# EAGLE board Sim_Breakout_Panel-v13 (EAGLE 6.5.0)
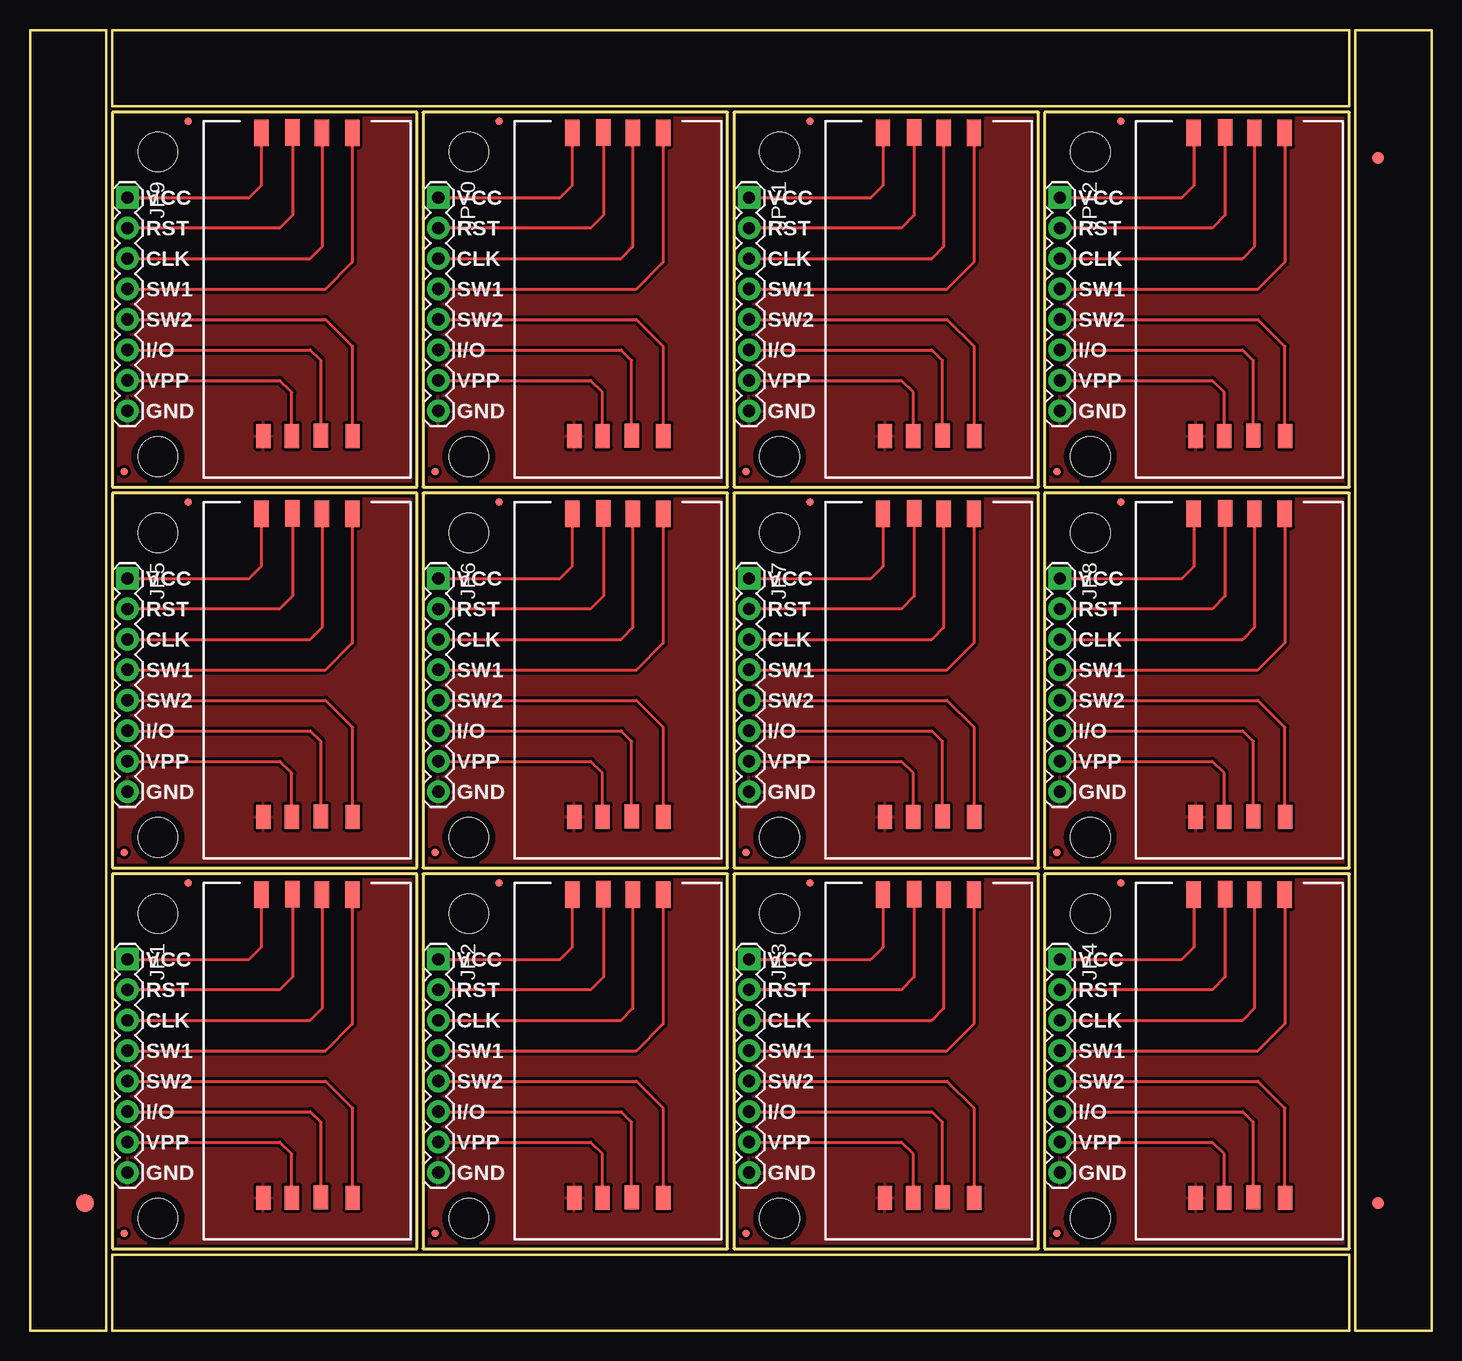
[diagram p0: board, top side]
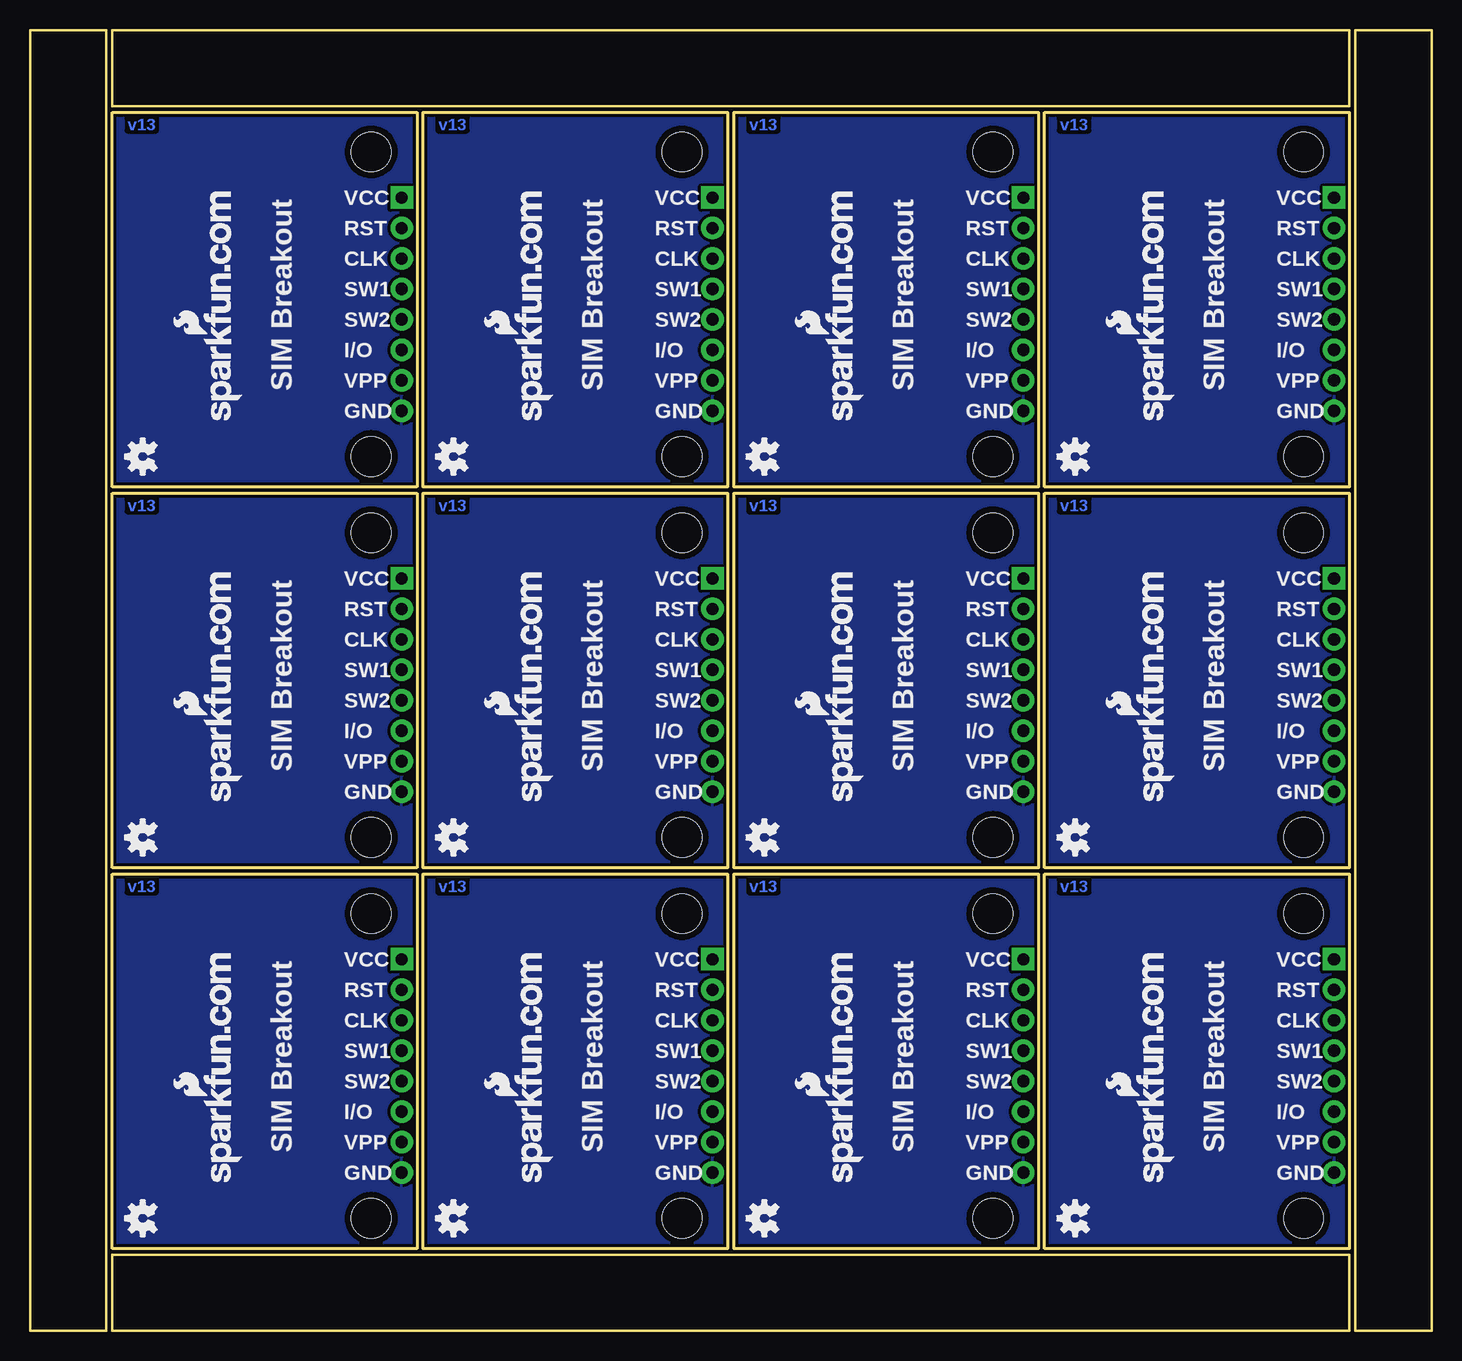
[diagram p1: board, bottom side, seen from below]

Size 116.84 x 108.46 mm. Coordinates in mm from the lower left corner, seen from the top.
Outline: 6.35,79.25 6.35,0 0,0 0,29.72
Outline: 116.84,79.25 116.84,0 110.49,0 110.49,29.72
Outline: 110.49,29.21 110.49,108.46 116.84,108.46 116.84,78.74
Outline: 0,29.21 0,108.46 6.35,108.46 6.35,78.74
Outline: 6.86,6.86 32.26,6.86 32.26,38.1 6.86,38.1 6.86,6.86
Outline: 32.77,6.86 58.17,6.86 58.17,38.1 32.77,38.1 32.77,6.86
Outline: 58.67,6.86 84.07,6.86 84.07,38.1 58.67,38.1 58.67,6.86
Outline: 84.58,6.86 109.98,6.86 109.98,38.1 84.58,38.1 84.58,6.86
Outline: 6.86,38.61 32.26,38.61 32.26,69.85 6.86,69.85 6.86,38.61
Outline: 32.77,38.61 58.17,38.61 58.17,69.85 32.77,69.85 32.77,38.61
Outline: 58.67,38.61 84.07,38.61 84.07,69.85 58.67,69.85 58.67,38.61
Outline: 84.58,38.61 109.98,38.61 109.98,69.85 84.58,69.85 84.58,38.61
Outline: 6.86,70.36 32.26,70.36 32.26,101.6 6.86,101.6 6.86,70.36
Outline: 32.77,70.36 58.17,70.36 58.17,101.6 32.77,101.6 32.77,70.36
Outline: 58.67,70.36 84.07,70.36 84.07,101.6 58.67,101.6 58.67,70.36
Outline: 84.58,70.36 109.98,70.36 109.98,101.6 84.58,101.6 84.58,70.36
Outline: 6.86,0 109.98,0 109.98,6.35 6.86,6.35 6.86,0
Outline: 109.98,108.46 6.86,108.46 6.86,102.11 109.98,102.11 109.98,108.46
Copper layers (1*16): Top 0.035mm / dielectric 1.5mm / Bottom 0.035mm
Design rules "SparkFun": minimum track width 8mil, minimum drill 20mil, track to track 8mil, track to pad 8mil, pad to pad 8mil, via to via 8mil, smd to smd 8mil, copper to edge 8mil, drill to drill 8mil, minimum pad ring 12mil, minimum via ring 10mil, stop-mask expansion 4mil, vias tented up to drill 20mil, thermal gap 10mil

## Footprints (pad centres in the part's own frame; a part is rotated, then mirrored left to right if it is on the bottom)
FIDUCIAL-1.5X3 = smd 1.5 x 1.5: 1 0,0
FIDUCIAL-1X2 = smd 1 x 1: 1 0,0
MICRO-FIDUCIAL = smd 0.635 x 0.635: 1 0,0
1X08 = drill 1.016 pad 1.88 square: 1 0,0 | drill 1.016 pad 1.88: 2 2.54,0; 3 5.08,0; 4 7.62,0; 5 10.16,0; 6 12.7,0; 7 15.24,0; 8 17.78,0
STAND-OFF = hole 3.302: 0,0
SIMHOLDER2 = smd 2.2 x 1.2: 1 0.95,4.81; 2 0.91,7.41; 3 0.95,9.86; 4 0.95,12.39 | smd 2 x 1.2: 5 26.22,12.42; 6 26.2,9.78; 7 26.22,7.34; 8 26.22,4.98

## Placement (x,y rotation side)
E$1  [FIDUCIAL-1.5X3]  4.57,10.67 0 top
E$4  [FIDUCIAL-1X2]  112.39,10.67 0 top
E$5  [FIDUCIAL-1X2]  112.39,97.79 180 top
FID1  FIDUCIALUFIDUCIAL  [MICRO-FIDUCIAL]  7.87,8.13 0 top
FID2  FIDUCIALUFIDUCIAL  [MICRO-FIDUCIAL]  13.21,37.34 0 top
FID3  FIDUCIALUFIDUCIAL  [MICRO-FIDUCIAL]  33.78,8.13 0 top
FID4  FIDUCIALUFIDUCIAL  [MICRO-FIDUCIAL]  39.12,37.34 0 top
FID5  FIDUCIALUFIDUCIAL  [MICRO-FIDUCIAL]  59.69,8.13 0 top
FID6  FIDUCIALUFIDUCIAL  [MICRO-FIDUCIAL]  65.02,37.34 0 top
FID7  FIDUCIALUFIDUCIAL  [MICRO-FIDUCIAL]  85.6,8.13 0 top
FID8  FIDUCIALUFIDUCIAL  [MICRO-FIDUCIAL]  90.93,37.34 0 top
FID9  FIDUCIALUFIDUCIAL  [MICRO-FIDUCIAL]  7.87,39.88 0 top
FID10  FIDUCIALUFIDUCIAL  [MICRO-FIDUCIAL]  13.21,69.09 0 top
FID11  FIDUCIALUFIDUCIAL  [MICRO-FIDUCIAL]  33.78,39.88 0 top
FID12  FIDUCIALUFIDUCIAL  [MICRO-FIDUCIAL]  39.12,69.09 0 top
FID13  FIDUCIALUFIDUCIAL  [MICRO-FIDUCIAL]  59.69,39.88 0 top
FID14  FIDUCIALUFIDUCIAL  [MICRO-FIDUCIAL]  65.02,69.09 0 top
FID15  FIDUCIALUFIDUCIAL  [MICRO-FIDUCIAL]  85.6,39.88 0 top
FID16  FIDUCIALUFIDUCIAL  [MICRO-FIDUCIAL]  90.93,69.09 0 top
FID17  FIDUCIALUFIDUCIAL  [MICRO-FIDUCIAL]  7.87,71.63 0 top
FID18  FIDUCIALUFIDUCIAL  [MICRO-FIDUCIAL]  13.21,100.84 0 top
FID19  FIDUCIALUFIDUCIAL  [MICRO-FIDUCIAL]  33.78,71.63 0 top
FID20  FIDUCIALUFIDUCIAL  [MICRO-FIDUCIAL]  39.12,100.84 0 top
FID21  FIDUCIALUFIDUCIAL  [MICRO-FIDUCIAL]  59.69,71.63 0 top
FID22  FIDUCIALUFIDUCIAL  [MICRO-FIDUCIAL]  65.02,100.84 0 top
FID23  FIDUCIALUFIDUCIAL  [MICRO-FIDUCIAL]  85.6,71.63 0 top
FID24  FIDUCIALUFIDUCIAL  [MICRO-FIDUCIAL]  90.93,100.84 0 top
JP1  [1X08]  8.13,30.99 270 top
JP2  [1X08]  34.04,30.99 270 top
JP3  [1X08]  59.94,30.99 270 top
JP4  [1X08]  85.85,30.99 270 top
JP5  [1X08]  8.13,62.74 270 top
JP6  [1X08]  34.04,62.74 270 top
JP7  [1X08]  59.94,62.74 270 top
JP8  [1X08]  85.85,62.74 270 top
JP9  [1X08]  8.13,94.49 270 top
JP10  [1X08]  34.04,94.49 270 top
JP11  [1X08]  59.94,94.49 270 top
JP12  [1X08]  85.85,94.49 270 top
LOGO1  OSHW-LOGOS  [OSHW-LOGO-S]  29.72,9.4 90 bottom
LOGO2  OSHW-LOGOS  [OSHW-LOGO-S]  55.63,9.4 90 bottom
LOGO3  OSHW-LOGOS  [OSHW-LOGO-S]  81.53,9.4 90 bottom
LOGO4  OSHW-LOGOS  [OSHW-LOGO-S]  107.44,9.4 90 bottom
LOGO5  OSHW-LOGOS  [OSHW-LOGO-S]  29.72,41.15 90 bottom
LOGO6  OSHW-LOGOS  [OSHW-LOGO-S]  55.63,41.15 90 bottom
LOGO7  OSHW-LOGOS  [OSHW-LOGO-S]  81.53,41.15 90 bottom
LOGO8  OSHW-LOGOS  [OSHW-LOGO-S]  107.44,41.15 90 bottom
LOGO9  OSHW-LOGOS  [OSHW-LOGO-S]  29.72,72.9 90 bottom
LOGO10  OSHW-LOGOS  [OSHW-LOGO-S]  55.63,72.9 90 bottom
LOGO11  OSHW-LOGOS  [OSHW-LOGO-S]  81.53,72.9 90 bottom
LOGO12  OSHW-LOGOS  [OSHW-LOGO-S]  107.44,72.9 90 bottom
STANDOFF1  STAND-OFF  [STAND-OFF]  10.67,34.8 0 top
STANDOFF2  STAND-OFF  [STAND-OFF]  10.67,9.4 0 top
STANDOFF3  STAND-OFF  [STAND-OFF]  36.58,34.8 0 top
STANDOFF4  STAND-OFF  [STAND-OFF]  36.58,9.4 0 top
STANDOFF5  STAND-OFF  [STAND-OFF]  62.48,34.8 0 top
STANDOFF6  STAND-OFF  [STAND-OFF]  62.48,9.4 0 top
STANDOFF7  STAND-OFF  [STAND-OFF]  88.39,34.8 0 top
STANDOFF8  STAND-OFF  [STAND-OFF]  88.39,9.4 0 top
STANDOFF9  STAND-OFF  [STAND-OFF]  10.67,66.55 0 top
STANDOFF10  STAND-OFF  [STAND-OFF]  10.67,41.15 0 top
STANDOFF11  STAND-OFF  [STAND-OFF]  36.58,66.55 0 top
STANDOFF12  STAND-OFF  [STAND-OFF]  36.58,41.15 0 top
STANDOFF13  STAND-OFF  [STAND-OFF]  62.48,66.55 0 top
STANDOFF14  STAND-OFF  [STAND-OFF]  62.48,41.15 0 top
STANDOFF15  STAND-OFF  [STAND-OFF]  88.39,66.55 0 top
STANDOFF16  STAND-OFF  [STAND-OFF]  88.39,41.15 0 top
STANDOFF17  STAND-OFF  [STAND-OFF]  10.67,98.3 0 top
STANDOFF18  STAND-OFF  [STAND-OFF]  10.67,72.9 0 top
STANDOFF19  STAND-OFF  [STAND-OFF]  36.58,98.3 0 top
STANDOFF20  STAND-OFF  [STAND-OFF]  36.58,72.9 0 top
STANDOFF21  STAND-OFF  [STAND-OFF]  62.48,98.3 0 top
STANDOFF22  STAND-OFF  [STAND-OFF]  62.48,72.9 0 top
STANDOFF23  STAND-OFF  [STAND-OFF]  88.39,98.3 0 top
STANDOFF24  STAND-OFF  [STAND-OFF]  88.39,72.9 0 top
U1  SIMHOLDER  [SIMHOLDER2]  40.39,37.34 270 top
U2  SIMHOLDER  [SIMHOLDER2]  14.48,37.34 270 top
U3  SIMHOLDER  [SIMHOLDER2]  66.29,37.34 270 top
U4  SIMHOLDER  [SIMHOLDER2]  92.2,37.34 270 top
U5  SIMHOLDER  [SIMHOLDER2]  14.48,69.09 270 top
U6  SIMHOLDER  [SIMHOLDER2]  40.39,69.09 270 top
U7  SIMHOLDER  [SIMHOLDER2]  66.29,69.09 270 top
U8  SIMHOLDER  [SIMHOLDER2]  92.2,69.09 270 top
U9  SIMHOLDER  [SIMHOLDER2]  14.48,100.84 270 top
U10  SIMHOLDER  [SIMHOLDER2]  40.39,100.84 270 top
U11  SIMHOLDER  [SIMHOLDER2]  66.29,100.84 270 top
U12  SIMHOLDER  [SIMHOLDER2]  92.2,100.84 270 top
U$1  [SFE-NEW-WEBLOGO]  21.46,12.45 90 bottom
U$2  [SFE-NEW-WEBLOGO]  47.37,12.45 90 bottom
U$3  [SFE-NEW-WEBLOGO]  73.28,12.45 90 bottom
U$4  [SFE-NEW-WEBLOGO]  99.19,12.45 90 bottom
U$5  [SFE-NEW-WEBLOGO]  21.46,44.2 90 bottom
U$6  [SFE-NEW-WEBLOGO]  47.37,44.2 90 bottom
U$7  [SFE-NEW-WEBLOGO]  73.28,44.2 90 bottom
U$8  [SFE-NEW-WEBLOGO]  99.19,44.2 90 bottom
U$9  [SFE-NEW-WEBLOGO]  21.46,75.95 90 bottom
U$10  [SFE-NEW-WEBLOGO]  47.37,75.95 90 bottom
U$11  [SFE-NEW-WEBLOGO]  73.28,75.95 90 bottom
U$12  [SFE-NEW-WEBLOGO]  99.19,75.95 90 bottom

## Library data of the parts
E$1 E$4 E$5 FID1-FID24 LOGO1-LOGO12 U$1-U$12 = SparkFun-Aesthetics
JP1-JP12 U1-U12 = SparkFun
STANDOFF1-STANDOFF24 = SparkFun-Electromechanical

## Nets
CLK: JP1.3 U2.3
CLK1: JP2.3 U1.3
CLK2: JP3.3 U3.3
CLK3: JP4.3 U4.3
CLK4: JP5.3 U5.3
CLK5: JP6.3 U6.3
CLK6: JP7.3 U7.3
CLK7: JP8.3 U8.3
CLK8: JP9.3 U9.3
CLK9: JP10.3 U10.3
CLK10: JP11.3 U11.3
CLK11: JP12.3 U12.3
GND: JP1.8 U2.8
GND1: JP2.8 U1.8
GND2: JP3.8 U3.8
GND3: JP4.8 U4.8
GND4: JP5.8 U5.8
GND5: JP6.8 U6.8
GND6: JP7.8 U7.8
GND7: JP8.8 U8.8
GND8: JP9.8 U9.8
GND9: JP10.8 U10.8
GND10: JP11.8 U11.8
GND11: JP12.8 U12.8
I/O: JP1.6 U2.6
I/O1: JP2.6 U1.6
I/O2: JP3.6 U3.6
I/O3: JP4.6 U4.6
I/O4: JP5.6 U5.6
I/O5: JP6.6 U6.6
I/O6: JP7.6 U7.6
I/O7: JP8.6 U8.6
I/O8: JP9.6 U9.6
I/O9: JP10.6 U10.6
I/O10: JP11.6 U11.6
I/O11: JP12.6 U12.6
RST: JP1.2 U2.2
RST1: JP2.2 U1.2
RST2: JP3.2 U3.2
RST3: JP4.2 U4.2
RST4: JP5.2 U5.2
RST5: JP6.2 U6.2
RST6: JP7.2 U7.2
RST7: JP8.2 U8.2
RST8: JP9.2 U9.2
RST9: JP10.2 U10.2
RST10: JP11.2 U11.2
RST11: JP12.2 U12.2
SW1: JP1.4 U2.4
SW2: JP1.5 U2.5
SW3: JP2.4 U1.4
SW4: JP2.5 U1.5
SW5: JP3.4 U3.4
SW6: JP3.5 U3.5
SW7: JP4.4 U4.4
SW8: JP4.5 U4.5
SW9: JP5.4 U5.4
SW10: JP5.5 U5.5
SW11: JP6.4 U6.4
SW12: JP6.5 U6.5
SW13: JP7.4 U7.4
SW14: JP7.5 U7.5
SW15: JP8.4 U8.4
SW16: JP8.5 U8.5
SW17: JP9.4 U9.4
SW18: JP9.5 U9.5
SW19: JP10.4 U10.4
SW20: JP10.5 U10.5
SW21: JP11.4 U11.4
SW22: JP11.5 U11.5
SW23: JP12.4 U12.4
SW24: JP12.5 U12.5
VCC: JP1.1 U2.1
VCC1: JP2.1 U1.1
VCC2: JP3.1 U3.1
VCC3: JP4.1 U4.1
VCC4: JP5.1 U5.1
VCC5: JP6.1 U6.1
VCC6: JP7.1 U7.1
VCC7: JP8.1 U8.1
VCC8: JP9.1 U9.1
VCC9: JP10.1 U10.1
VCC10: JP11.1 U11.1
VCC11: JP12.1 U12.1
VPP: JP1.7 U2.7
VPP1: JP2.7 U1.7
VPP2: JP3.7 U3.7
VPP3: JP4.7 U4.7
VPP4: JP5.7 U5.7
VPP5: JP6.7 U6.7
VPP6: JP7.7 U7.7
VPP7: JP8.7 U8.7
VPP8: JP9.7 U9.7
VPP9: JP10.7 U10.7
VPP10: JP11.7 U11.7
VPP11: JP12.7 U12.7

## Tracks (layer width: path | path; a pad name or v marks a point on that pad's centre or on a via)
CLK
  Top 0.254: U2.3 24.34,26.88 23.37,25.91 JP1.3
CLK1
  Top 0.254: U1.3 50.25,26.88 49.28,25.91 JP2.3
CLK2
  Top 0.254: U3.3 76.15,26.88 75.18,25.91 JP3.3
CLK3
  Top 0.254: U4.3 102.06,26.88 101.09,25.91 JP4.3
CLK4
  Top 0.254: U5.3 24.34,58.63 23.37,57.66 JP5.3
CLK5
  Top 0.254: U6.3 50.25,58.63 49.28,57.66 JP6.3
CLK6
  Top 0.254: U7.3 76.15,58.63 75.18,57.66 JP7.3
CLK7
  Top 0.254: U8.3 102.06,58.63 101.09,57.66 JP8.3
CLK8
  Top 0.254: U9.3 24.34,90.38 23.37,89.41 JP9.3
CLK9
  Top 0.254: U10.3 50.25,90.38 49.28,89.41 JP10.3
CLK10
  Top 0.254: U11.3 76.15,90.38 75.18,89.41 JP11.3
CLK11
  Top 0.254: U12.3 102.06,90.38 101.09,89.41 JP12.3
GND
  Top 0.254: U2.8 19.56,11.02 19.56,10.67
  pour Bottom (isolate 0.254): 6.86,6.86 6.86,38.1 32.26,38.1 32.26,6.86
  pour Top (isolate 0.254): 6.86,6.86 6.86,38.1 32.26,38.1 32.26,6.86
GND1
  Top 0.254: U1.8 45.47,11.02 45.47,10.67
  pour Bottom (isolate 0.254): 32.77,6.86 32.77,38.1 58.17,38.1 58.17,6.86
  pour Top (isolate 0.254): 32.77,6.86 32.77,38.1 58.17,38.1 58.17,6.86
GND2
  Top 0.254: U3.8 71.37,11.02 71.37,10.67
  pour Bottom (isolate 0.254): 58.67,6.86 58.67,38.1 84.07,38.1 84.07,6.86
  pour Top (isolate 0.254): 58.67,6.86 58.67,38.1 84.07,38.1 84.07,6.86
GND3
  Top 0.254: U4.8 97.28,11.02 97.28,10.67
  pour Bottom (isolate 0.254): 84.58,6.86 84.58,38.1 109.98,38.1 109.98,6.86
  pour Top (isolate 0.254): 84.58,6.86 84.58,38.1 109.98,38.1 109.98,6.86
GND4
  Top 0.254: U5.8 19.56,42.77 19.56,42.42
  pour Bottom (isolate 0.254): 6.86,38.61 6.86,69.85 32.26,69.85 32.26,38.61
  pour Top (isolate 0.254): 6.86,38.61 6.86,69.85 32.26,69.85 32.26,38.61
GND5
  Top 0.254: U6.8 45.47,42.77 45.47,42.42
  pour Bottom (isolate 0.254): 32.77,38.61 32.77,69.85 58.17,69.85 58.17,38.61
  pour Top (isolate 0.254): 32.77,38.61 32.77,69.85 58.17,69.85 58.17,38.61
GND6
  Top 0.254: U7.8 71.37,42.77 71.37,42.42
  pour Bottom (isolate 0.254): 58.67,38.61 58.67,69.85 84.07,69.85 84.07,38.61
  pour Top (isolate 0.254): 58.67,38.61 58.67,69.85 84.07,69.85 84.07,38.61
GND7
  Top 0.254: U8.8 97.28,42.77 97.28,42.42
  pour Bottom (isolate 0.254): 84.58,38.61 84.58,69.85 109.98,69.85 109.98,38.61
  pour Top (isolate 0.254): 84.58,38.61 84.58,69.85 109.98,69.85 109.98,38.61
GND8
  Top 0.254: U9.8 19.56,74.52 19.56,74.17
  pour Bottom (isolate 0.254): 6.86,70.36 6.86,101.6 32.26,101.6 32.26,70.36
  pour Top (isolate 0.254): 6.86,70.36 6.86,101.6 32.26,101.6 32.26,70.36
GND9
  Top 0.254: U10.8 45.47,74.52 45.47,74.17
  pour Bottom (isolate 0.254): 32.77,70.36 32.77,101.6 58.17,101.6 58.17,70.36
  pour Top (isolate 0.254): 32.77,70.36 32.77,101.6 58.17,101.6 58.17,70.36
GND10
  Top 0.254: U11.8 71.37,74.52 71.37,74.17
  pour Bottom (isolate 0.254): 58.67,70.36 58.67,101.6 84.07,101.6 84.07,70.36
  pour Top (isolate 0.254): 58.67,70.36 58.67,101.6 84.07,101.6 84.07,70.36
GND11
  Top 0.254: U12.8 97.28,74.52 97.28,74.17
  pour Bottom (isolate 0.254): 84.58,70.36 84.58,101.6 109.98,101.6 109.98,70.36
  pour Top (isolate 0.254): 84.58,70.36 84.58,101.6 109.98,101.6 109.98,70.36
I/O
  Top 0.254: JP1.6 23.37,18.29 24.26,17.4 U2.6
I/O1
  Top 0.254: JP2.6 49.28,18.29 50.17,17.4 U1.6
I/O2
  Top 0.254: JP3.6 75.18,18.29 76.07,17.4 U3.6
I/O3
  Top 0.254: JP4.6 101.09,18.29 101.98,17.4 U4.6
I/O4
  Top 0.254: JP5.6 23.37,50.04 24.26,49.15 U5.6
I/O5
  Top 0.254: JP6.6 49.28,50.04 50.17,49.15 U6.6
I/O6
  Top 0.254: JP7.6 75.18,50.04 76.07,49.15 U7.6
I/O7
  Top 0.254: JP8.6 101.09,50.04 101.98,49.15 U8.6
I/O8
  Top 0.254: JP9.6 23.37,81.79 24.26,80.9 U9.6
I/O9
  Top 0.254: JP10.6 49.28,81.79 50.17,80.9 U10.6
I/O10
  Top 0.254: JP11.6 75.18,81.79 76.07,80.9 U11.6
I/O11
  Top 0.254: JP12.6 101.09,81.79 101.98,80.9 U12.6
RST
  Top 0.254: U2.2 21.89,29.51 20.83,28.45 JP1.2
RST1
  Top 0.254: U1.2 47.8,29.51 46.74,28.45 JP2.2
RST2
  Top 0.254: U3.2 73.7,29.51 72.64,28.45 JP3.2
RST3
  Top 0.254: U4.2 99.61,29.51 98.55,28.45 JP4.2
RST4
  Top 0.254: U5.2 21.89,61.26 20.83,60.2 JP5.2
RST5
  Top 0.254: U6.2 47.8,61.26 46.74,60.2 JP6.2
RST6
  Top 0.254: U7.2 73.7,61.26 72.64,60.2 JP7.2
RST7
  Top 0.254: U8.2 99.61,61.26 98.55,60.2 JP8.2
RST8
  Top 0.254: U9.2 21.89,93.01 20.83,91.95 JP9.2
RST9
  Top 0.254: U10.2 47.8,93.01 46.74,91.95 JP10.2
RST10
  Top 0.254: U11.2 73.7,93.01 72.64,91.95 JP11.2
RST11
  Top 0.254: U12.2 99.61,93.01 98.55,91.95 JP12.2
SW1
  Top 0.254: U2.4 26.87,25.6 24.64,23.37 JP1.4
SW2
  Top 0.254: JP1.5 24.64,20.83 26.9,18.57 U2.5
SW3
  Top 0.254: U1.4 52.78,25.6 50.55,23.37 JP2.4
SW4
  Top 0.254: JP2.5 50.55,20.83 52.81,18.57 U1.5
SW5
  Top 0.254: U3.4 78.68,25.6 76.45,23.37 JP3.4
SW6
  Top 0.254: JP3.5 76.45,20.83 78.71,18.57 U3.5
SW7
  Top 0.254: U4.4 104.59,25.6 102.36,23.37 JP4.4
SW8
  Top 0.254: JP4.5 102.36,20.83 104.62,18.57 U4.5
SW9
  Top 0.254: U5.4 26.87,57.35 24.64,55.12 JP5.4
SW10
  Top 0.254: JP5.5 24.64,52.58 26.9,50.32 U5.5
SW11
  Top 0.254: U6.4 52.78,57.35 50.55,55.12 JP6.4
SW12
  Top 0.254: JP6.5 50.55,52.58 52.81,50.32 U6.5
SW13
  Top 0.254: U7.4 78.68,57.35 76.45,55.12 JP7.4
SW14
  Top 0.254: JP7.5 76.45,52.58 78.71,50.32 U7.5
SW15
  Top 0.254: U8.4 104.59,57.35 102.36,55.12 JP8.4
SW16
  Top 0.254: JP8.5 102.36,52.58 104.62,50.32 U8.5
SW17
  Top 0.254: U9.4 26.87,89.1 24.64,86.87 JP9.4
SW18
  Top 0.254: JP9.5 24.64,84.33 26.9,82.07 U9.5
SW19
  Top 0.254: U10.4 52.78,89.1 50.55,86.87 JP10.4
SW20
  Top 0.254: JP10.5 50.55,84.33 52.81,82.07 U10.5
SW21
  Top 0.254: U11.4 78.68,89.1 76.45,86.87 JP11.4
SW22
  Top 0.254: JP11.5 76.45,84.33 78.71,82.07 U11.5
SW23
  Top 0.254: U12.4 104.59,89.1 102.36,86.87 JP12.4
SW24
  Top 0.254: JP12.5 102.36,84.33 104.62,82.07 U12.5
VCC
  Top 0.254: JP1.1 18.29,30.99 19.29,31.99 U2.1
VCC1
  Top 0.254: JP2.1 44.2,30.99 45.2,31.99 U1.1
VCC2
  Top 0.254: JP3.1 70.1,30.99 71.1,31.99 U3.1
VCC3
  Top 0.254: JP4.1 96.01,30.99 97.01,31.99 U4.1
VCC4
  Top 0.254: JP5.1 18.29,62.74 19.29,63.74 U5.1
VCC5
  Top 0.254: JP6.1 44.2,62.74 45.2,63.74 U6.1
VCC6
  Top 0.254: JP7.1 70.1,62.74 71.1,63.74 U7.1
VCC7
  Top 0.254: JP8.1 96.01,62.74 97.01,63.74 U8.1
VCC8
  Top 0.254: JP9.1 18.29,94.49 19.29,95.49 U9.1
VCC9
  Top 0.254: JP10.1 44.2,94.49 45.2,95.49 U10.1
VCC10
  Top 0.254: JP11.1 70.1,94.49 71.1,95.49 U11.1
VCC11
  Top 0.254: JP12.1 96.01,94.49 97.01,95.49 U12.1
VPP
  Top 0.254: JP1.7 20.83,15.75 21.82,14.76 U2.7
VPP1
  Top 0.254: JP2.7 46.74,15.75 47.73,14.76 U1.7
VPP2
  Top 0.254: JP3.7 72.64,15.75 73.63,14.76 U3.7
VPP3
  Top 0.254: JP4.7 98.55,15.75 99.54,14.76 U4.7
VPP4
  Top 0.254: JP5.7 20.83,47.5 21.82,46.51 U5.7
VPP5
  Top 0.254: JP6.7 46.74,47.5 47.73,46.51 U6.7
VPP6
  Top 0.254: JP7.7 72.64,47.5 73.63,46.51 U7.7
VPP7
  Top 0.254: JP8.7 98.55,47.5 99.54,46.51 U8.7
VPP8
  Top 0.254: JP9.7 20.83,79.25 21.82,78.26 U9.7
VPP9
  Top 0.254: JP10.7 46.74,79.25 47.73,78.26 U10.7
VPP10
  Top 0.254: JP11.7 72.64,79.25 73.63,78.26 U11.7
VPP11
  Top 0.254: JP12.7 98.55,79.25 99.54,78.26 U12.7

## Text on the board
Bottom: v13 | v13 | v13 | v13 | v13 | v13 | v13 | v13 | v13 | v13 | v13 | v13
tPlace: VCC | VCC | VCC | VCC | RST | RST | RST | RST | CLK | CLK | CLK | CLK | SW1 | SW1 | SW1 | SW1 | SW2 | SW2 | SW2 | SW2 | I/O | I/O | I/O | I/O | VPP | VPP | VPP | VPP | GND | GND | GND | GND | VCC | VCC | VCC | VCC | RST | RST | RST | RST | CLK | CLK | CLK | CLK | SW1 | SW1 | SW1 | SW1 | SW2 | SW2 | SW2 | SW2 | I/O | I/O | I/O | I/O | VPP | VPP | VPP | VPP | GND | GND | GND | GND | VCC | VCC | VCC | VCC | RST | RST | RST | RST | CLK | CLK | CLK | CLK | SW1 | SW1 | SW1 | SW1 | SW2 | SW2 | SW2 | SW2 | I/O | I/O | I/O | I/O | VPP | VPP | VPP | VPP | GND | GND | GND | GND
bPlace: VCC | SIM Breakout | VCC | SIM Breakout | VCC | SIM Breakout | VCC | SIM Breakout | RST | RST | RST | RST | CLK | CLK | CLK | CLK | SW1 | SW1 | SW1 | SW1 | SW2 | SW2 | SW2 | SW2 | I/O | I/O | I/O | I/O | VPP | VPP | VPP | VPP | GND | GND | GND | GND | SIM Breakout | SIM Breakout | SIM Breakout | SIM Breakout | VCC | VCC | VCC | VCC | RST | RST | RST | RST | CLK | CLK | CLK | CLK | SW1 | SW1 | SW1 | SW1 | SW2 | SW2 | SW2 | SW2 | I/O | I/O | I/O | I/O | VPP | VPP | VPP | VPP | GND | GND | GND | GND | SIM Breakout | SIM Breakout | SIM Breakout | SIM Breakout | VCC | VCC | VCC | VCC | RST | RST | RST | RST | CLK | CLK | CLK | CLK | SW1 | SW1 | SW1 | SW1 | SW2 | SW2 | SW2 | SW2 | I/O | I/O | I/O | I/O | VPP | VPP | VPP | VPP | GND | GND | GND | GND